# EAGLE board door bell (EAGLE 9.1.3)

Size 205.87 x 100 mm. Coordinates in mm from the lower left corner, seen from the top.
Outline: 45.87,0 205.87,0 205.87,100 45.87,100 45.87,0
Copper layers (1*16): Top 0.035mm / dielectric 1.5mm / Bottom 0.035mm
Design rules "default": minimum track width 6mil, minimum drill 0.35mm, track to track 6mil, track to pad 6mil, pad to pad 6mil, via to via 6mil, smd to smd 6mil, copper to edge 40mil, drill to drill 6mil, minimum pad ring 10mil, minimum via ring 8mil, stop-mask expansion 4mil, vias tented up to drill 0mil, thermal gap 10mil

## Footprints (pad centres in the part's own frame; a part is rotated, then mirrored left to right if it is on the bottom)
SL-340/P3.6V = drill 1.016 pad 2.159 octagon: + 0,0; - -7.62,0
A/3216-18W = smd 2.15 x 1.8: + 1.475,0; - -1.475,0
DIL-08 = drill 0.813 long: 1 -3.81,-3.81; 2 -1.27,-3.81; 3 1.27,-3.81; 4 3.81,-3.81; 5 3.81,3.81; 6 1.27,3.81; 7 -1.27,3.81; 8 -3.81,3.81
AXIAL-0.3 = drill 0.9 pad 1.88: P$1 -3.81,0; P$2 3.81,0
SMS-1308MS-2-R = smd 1.4 x 2.2: + -5.375,-4.35; - 5.375,-4.35; M1 -5.375,4.35; M2 5.375,4.35
CT10-XXXX-A2 = smd 1.8 x 1.8: 1 -7.5,0; 2 7.5,0

## Placement (x,y rotation side)
+9V  SL340P  [SL-340/P3.6V]  21.74,11.43 0 top
C1  [A/3216-18W]  29.36,49.53 0 top
C2  [A/3216-18W]  23.01,49.53 0 top
IC1  NE555P  [DIL-08]  7.77,30.48 0 top
R1  [AXIAL-0.3]  15.39,49.53 0 top
R2  [AXIAL-0.3]  5.23,49.53 0 top
R3  [AXIAL-0.3]  28.09,54.61 0 top
SP1  SMS-1308MS-2-R  [SMS-1308MS-2-R]  20.47,31.75 0 top
SW1  CT10-XXXX-A2  [CT10-XXXX-A2]  24.28,44.45 0 top
SW2  CT10-XXXX-A2  [CT10-XXXX-A2]  6.5,44.45 0 top

## Library data of the parts
+9V = battery
C1 C2 = rcl
IC1 = SparkFun-AnalogIC; MF: Arrow Electronics; MPN: NE555N; OC_FARNELL: 1467742; OC_NEWARK: 89K1486
R1-R3 = SparkFun-Passives
SP1 = speaker
SW1 SW2 = switch-coto

## Nets
N$1: C2.+ IC1.3
N$2: C2.- SP1.-
N$3: C1.+ IC1.2 IC1.6 R1.P$2
N$4: +9V.- C1.- IC1.1
N$5: R3.P$2 SW1.1
N$6: IC1.4 IC1.8 R2.P$1 SW2.1
N$8: IC1.7 R1.P$1 R2.P$2 R3.P$1
N$9: +9V.+ SP1.+ SW1.2 SW2.2

## Tracks (layer width: path | path; a pad name or v marks a point on that pad's centre or on a via)
N$1  (1 unrouted)
N$2  (1 unrouted)
N$3  (3 unrouted)
N$4  (2 unrouted)
N$5  (1 unrouted)
N$6  (3 unrouted)
N$8  (3 unrouted)
N$9  (3 unrouted)